# EAGLE board Qwiic_Button-1c-Panel (EAGLE 9.3.0), part 1 of 2
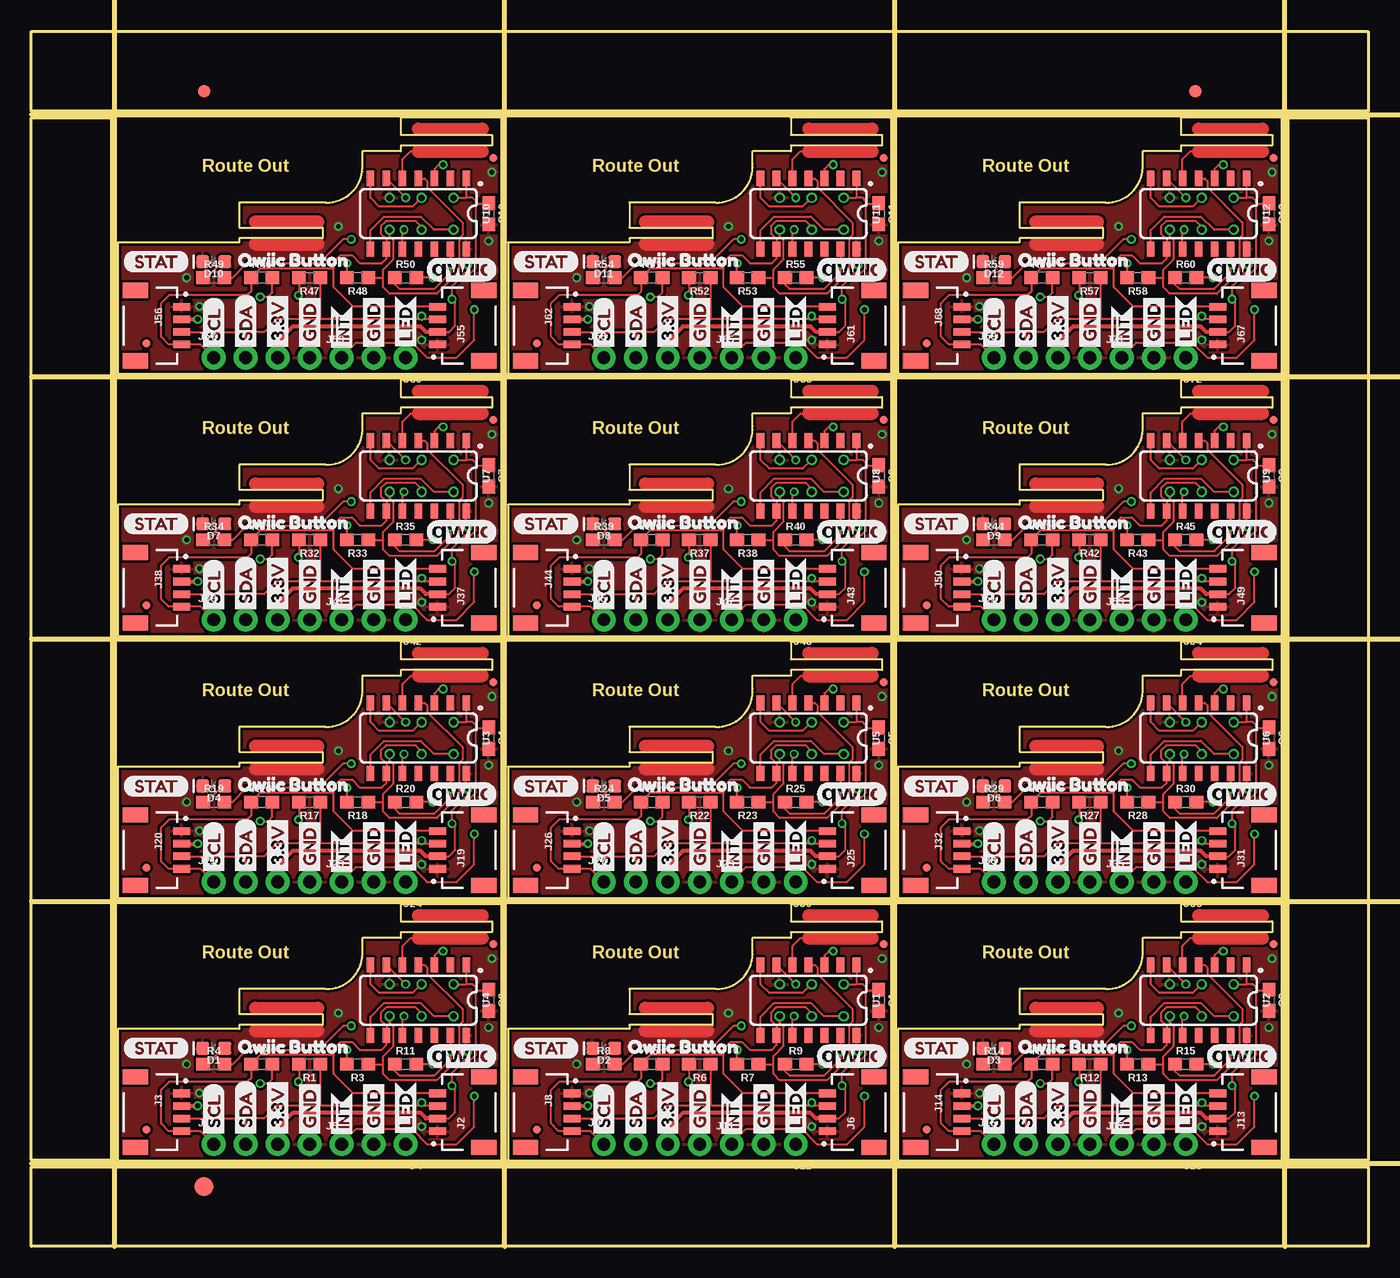
[diagram p0: board, top side]
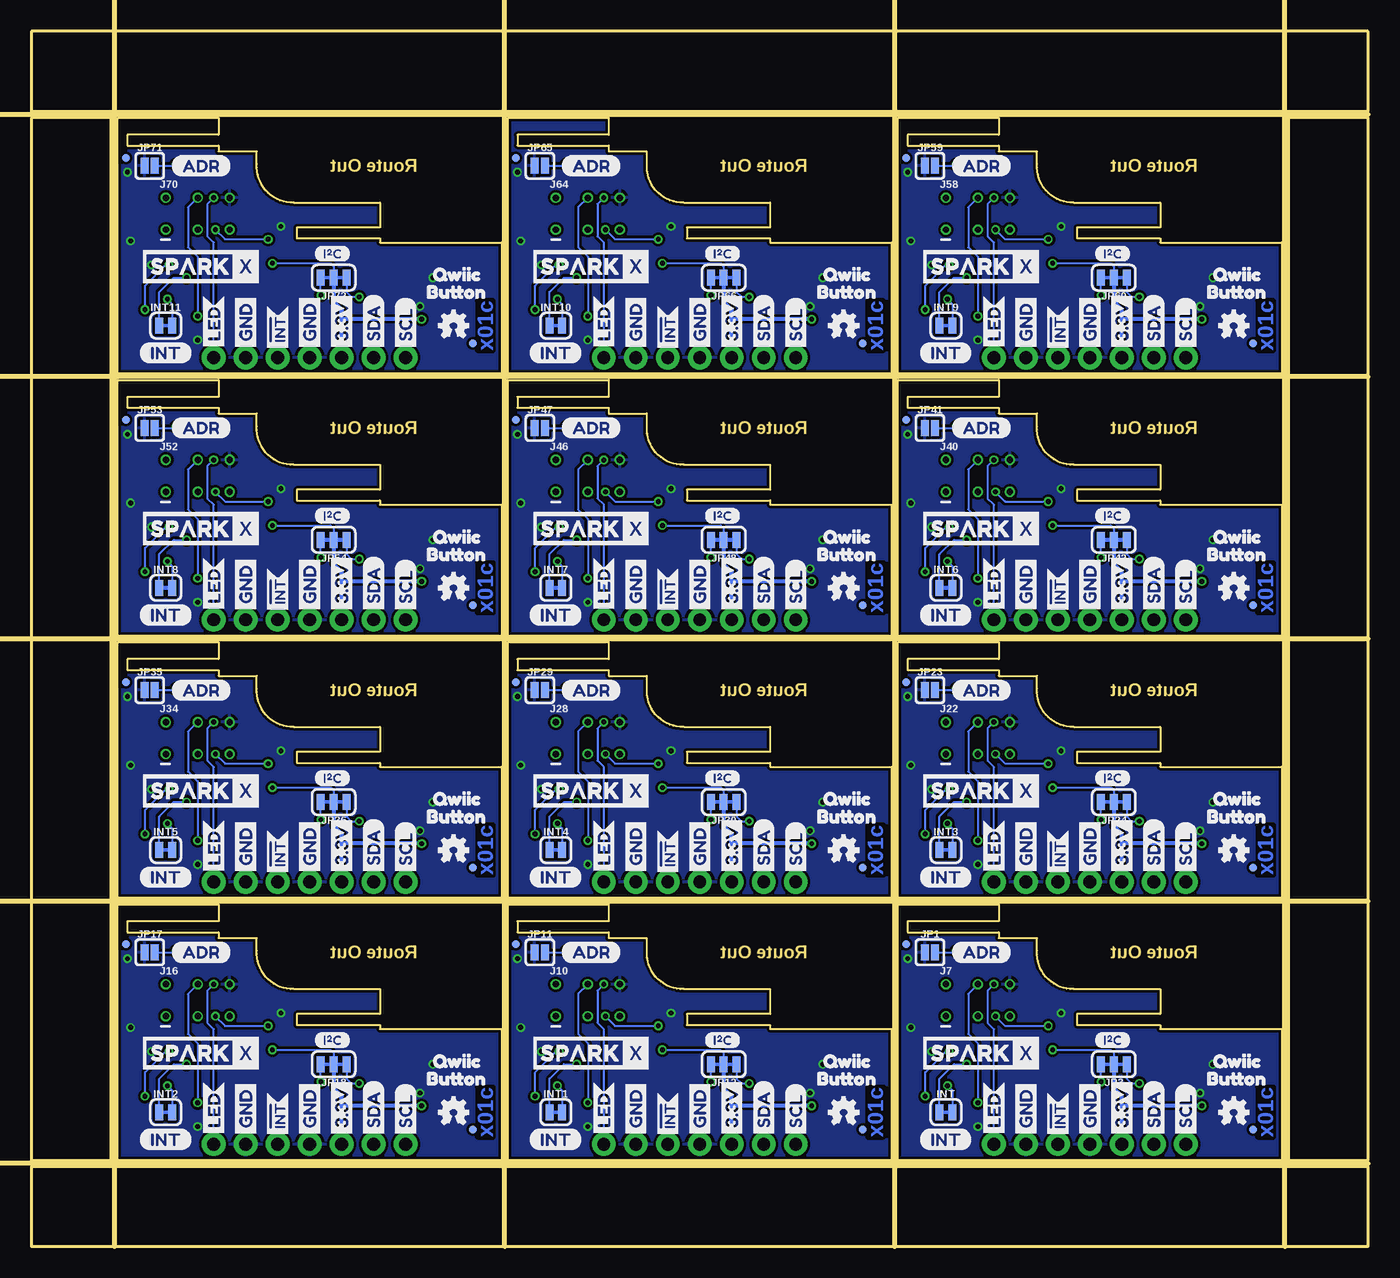
[diagram p1: board, bottom side, seen from below]

Size 106.17 x 96.52 mm. Coordinates in mm from the lower left corner, seen from the top.
Outline: 6.86,6.86 37.34,6.86 37.34,27.18 29.34,27.18 29.34,25.83 36.58,25.83 36.58,24.97 29.34,24.97 29.34,24.51 26.29,24.51 26.29,23.5 arc-96 23.37,20.45 16.51,20.45 16.51,18.47 23.11,18.47 23.11,17.6 16.51,17.6 16.51,17.27 6.86,17.27 6.86,6.86
Outline: 37.85,6.86 68.33,6.86 68.33,27.18 60.32,27.18 60.32,25.83 67.56,25.83 67.56,24.97 60.32,24.97 60.32,24.51 57.28,24.51 57.28,23.5 arc-96 54.36,20.45 47.5,20.45 47.5,18.47 54.1,18.47 54.1,17.6 47.5,17.6 47.5,17.27 37.85,17.27 37.85,6.86
Outline: 68.83,6.86 99.31,6.86 99.31,27.18 91.31,27.18 91.31,25.83 98.55,25.83 98.55,24.97 91.31,24.97 91.31,24.51 88.27,24.51 88.27,23.5 arc-96 85.34,20.45 78.49,20.45 78.49,18.47 85.09,18.47 85.09,17.6 78.49,17.6 78.49,17.27 68.83,17.27 68.83,6.86
Outline: 6.86,27.69 37.34,27.69 37.34,48.01 29.34,48.01 29.34,46.66 36.58,46.66 36.58,45.8 29.34,45.8 29.34,45.34 26.29,45.34 26.29,44.32 arc-96 23.37,41.27 16.51,41.27 16.51,39.29 23.11,39.29 23.11,38.43 16.51,38.43 16.51,38.1 6.86,38.1 6.86,27.69
Outline: 37.85,27.69 68.33,27.69 68.33,48.01 60.32,48.01 60.32,46.66 67.56,46.66 67.56,45.8 60.32,45.8 60.32,45.34 57.28,45.34 57.28,44.32 arc-96 54.36,41.27 47.5,41.27 47.5,39.29 54.1,39.29 54.1,38.43 47.5,38.43 47.5,38.1 37.85,38.1 37.85,27.69
Outline: 68.83,27.69 99.31,27.69 99.31,48.01 91.31,48.01 91.31,46.66 98.55,46.66 98.55,45.8 91.31,45.8 91.31,45.34 88.27,45.34 88.27,44.32 arc-96 85.34,41.27 78.49,41.27 78.49,39.29 85.09,39.29 85.09,38.43 78.49,38.43 78.49,38.1 68.83,38.1 68.83,27.69
Outline: 6.86,48.51 37.34,48.51 37.34,68.83 29.34,68.83 29.34,67.49 36.58,67.49 36.58,66.62 29.34,66.62 29.34,66.17 26.29,66.17 26.29,65.15 arc-96 23.37,62.1 16.51,62.1 16.51,60.12 23.11,60.12 23.11,59.26 16.51,59.26 16.51,58.93 6.86,58.93 6.86,48.51
Outline: 37.85,48.51 68.33,48.51 68.33,68.83 60.32,68.83 60.32,67.49 67.56,67.49 67.56,66.62 60.32,66.62 60.32,66.17 57.28,66.17 57.28,65.15 arc-96 54.36,62.1 47.5,62.1 47.5,60.12 54.1,60.12 54.1,59.26 47.5,59.26 47.5,58.93 37.85,58.93 37.85,48.51
Outline: 68.83,48.51 99.31,48.51 99.31,68.83 91.31,68.83 91.31,67.49 98.55,67.49 98.55,66.62 91.31,66.62 91.31,66.17 88.27,66.17 88.27,65.15 arc-96 85.34,62.1 78.49,62.1 78.49,60.12 85.09,60.12 85.09,59.26 78.49,59.26 78.49,58.93 68.83,58.93 68.83,48.51
Outline: 6.86,69.34 37.34,69.34 37.34,89.66 29.34,89.66 29.34,88.32 36.58,88.32 36.58,87.45 29.34,87.45 29.34,87 26.29,87 26.29,85.98 arc-96 23.37,82.93 16.51,82.93 16.51,80.95 23.11,80.95 23.11,80.09 16.51,80.09 16.51,79.76 6.86,79.76 6.86,69.34
Outline: 37.85,69.34 68.33,69.34 68.33,89.66 60.32,89.66 60.32,88.32 67.56,88.32 67.56,87.45 60.32,87.45 60.32,87 57.28,87 57.28,85.98 arc-96 54.36,82.93 47.5,82.93 47.5,80.95 54.1,80.95 54.1,80.09 47.5,80.09 47.5,79.76 37.85,79.76 37.85,69.34
Outline: 68.83,69.34 99.31,69.34 99.31,89.66 91.31,89.66 91.31,88.32 98.55,88.32 98.55,87.45 91.31,87.45 91.31,87 88.27,87 88.27,85.98 arc-96 85.34,82.93 78.49,82.93 78.49,80.95 85.09,80.95 85.09,80.09 78.49,80.09 78.49,79.76 68.83,79.76 68.83,69.34
Outline: 0,6.35 106.17,6.35 106.17,0 0,0 0,6.35
Outline: 99.82,89.66 106.17,89.66 106.17,6.86 99.82,6.86 99.82,89.66
Outline: 0,96.52 106.17,96.52 106.17,90.17 0,90.17 0,96.52
Outline: 0,89.66 6.35,89.66 6.35,6.86 0,6.86 0,89.66
Copper layers (1*16): Top 0.035mm / dielectric 1.5mm / Bottom 0.035mm
Design rules "SparkFun-2-layer-PCBWay-LIMIT": minimum track width 6mil, minimum drill 0.3mm, track to track 6mil, track to pad 6mil, pad to pad 6mil, via to via 6mil, smd to smd 6mil, copper to edge 6mil, drill to drill 6mil, minimum pad ring 6mil, minimum via ring 6mil, stop-mask expansion 4mil, vias tented up to drill 25mil, thermal gap 10mil
Milling: 9 lines

## Footprints (pad centres in the part's own frame; a part is rotated, then mirrored left to right if it is on the bottom)
0603 = smd 1.1 x 1: 1 -0.85,0; 2 0.85,0
LED-0603 = smd 1 x 1: A -0.877,0; C 0.877,0
FIDUCIAL-1X2 = smd 1 x 1: 1 0,0
FIDUCIAL-1.5X3 = smd 1.5 x 1.5: 1 0,0
SMT-JUMPER_2_NC_TRACE_SILK = smd 0.635 x 1.27: 1 -0.508,0; 2 0.508,0
1X04_NO_SILK = drill 1.016 pad 1.88: 1 0,0; 2 2.54,0; 3 5.08,0; 4 7.62,0
JST04_1MM_RA = smd 0.6 x 1.35: 1 -1.5,0; 2 -0.5,0; 3 0.5,0; 4 1.5,0 | smd 1.2 x 2: NC1 2.8,-3.675; NC2 -2.8,-3.675
1X02_NO_SILK = drill 1.016 pad 1.88: 1 0,0; 2 2.54,0
1X01_NO_SILK = drill 1.016 pad 1.88: 1 0,0
2X3_TEST_POINTS = drill 0.508: 1 -2.54,-1.27; 2 -2.54,1.27; 3 0,-1.27; 4 0,1.27; 5 2.54,-1.27; 6 2.54,1.27
SMT-JUMPER_2_NO_SILK = smd 0.635 x 1.27: 1 -0.406,0; 2 0.406,0
MICRO-FIDUCIAL = smd 0.635 x 0.635: 1 0,0
SMT-JUMPER_3_2-NC_TRACE_SILK = smd 0.635 x 1.27: 1 -1.016,0; 2 0,0; 3 1.016,0
SO14 = smd 0.6 x 1.2: 1 -3.175,-2.8; 2 -1.905,-2.8; 3 -0.635,-2.8; 4 0.635,-2.8; 5 1.905,-2.8; 6 3.175,-2.8; 7 4.445,-2.8; 8 4.445,2.8; 9 3.175,2.8; 10 1.905,2.8; 11 0.635,2.8; 12 -0.635,2.8; 13 -1.905,2.8; 14 -3.175,2.8

## Placement (x,y rotation side)
C1  0.1uF  [0603]  67.31,19.56 270 top
C2  0.1uF  [0603]  36.32,19.56 270 top
C3  0.1uF  [0603]  98.3,19.56 270 top
C4  0.1uF  [0603]  36.32,40.39 270 top
C5  0.1uF  [0603]  67.31,40.39 270 top
C6  0.1uF  [0603]  98.3,40.39 270 top
C7  0.1uF  [0603]  36.32,61.21 270 top
C8  0.1uF  [0603]  67.31,61.21 270 top
C9  0.1uF  [0603]  98.3,61.21 270 top
C10  0.1uF  [0603]  36.32,82.04 270 top
C11  0.1uF  [0603]  67.31,82.04 270 top
C12  0.1uF  [0603]  98.3,82.04 270 top
D1  RED  [LED-0603]  14.48,15.75 180 top
D2  RED  [LED-0603]  45.47,15.75 180 top
D3  RED  [LED-0603]  76.45,15.75 180 top
D4  RED  [LED-0603]  14.48,36.58 180 top
D5  RED  [LED-0603]  45.47,36.58 180 top
D6  RED  [LED-0603]  76.45,36.58 180 top
D7  RED  [LED-0603]  14.48,57.4 180 top
D8  RED  [LED-0603]  45.47,57.4 180 top
D9  RED  [LED-0603]  76.45,57.4 180 top
D10  RED  [LED-0603]  14.48,78.23 180 top
D11  RED  [LED-0603]  45.47,78.23 180 top
D12  RED  [LED-0603]  76.45,78.23 180 top
E$1  [FIDUCIAL-1X2]  13.72,91.76 0 top
E$2  [FIDUCIAL-1X2]  92.46,91.76 0 top
E$3  [FIDUCIAL-1.5X3]  13.72,4.76 0 top
INT  JUMPER-SMT_2_NC_TRACE_SILK  [SMT-JUMPER_2_NC_TRACE_SILK]  33.53,10.67 0 bottom
INT1  JUMPER-SMT_2_NC_TRACE_SILK  [SMT-JUMPER_2_NC_TRACE_SILK]  64.52,10.67 0 bottom
INT2  JUMPER-SMT_2_NC_TRACE_SILK  [SMT-JUMPER_2_NC_TRACE_SILK]  95.5,10.67 0 bottom
INT3  JUMPER-SMT_2_NC_TRACE_SILK  [SMT-JUMPER_2_NC_TRACE_SILK]  33.53,31.5 0 bottom
INT4  JUMPER-SMT_2_NC_TRACE_SILK  [SMT-JUMPER_2_NC_TRACE_SILK]  64.52,31.5 0 bottom
INT5  JUMPER-SMT_2_NC_TRACE_SILK  [SMT-JUMPER_2_NC_TRACE_SILK]  95.5,31.5 0 bottom
INT6  JUMPER-SMT_2_NC_TRACE_SILK  [SMT-JUMPER_2_NC_TRACE_SILK]  33.53,52.32 0 bottom
INT7  JUMPER-SMT_2_NC_TRACE_SILK  [SMT-JUMPER_2_NC_TRACE_SILK]  64.52,52.32 0 bottom
INT8  JUMPER-SMT_2_NC_TRACE_SILK  [SMT-JUMPER_2_NC_TRACE_SILK]  95.5,52.32 0 bottom
INT9  JUMPER-SMT_2_NC_TRACE_SILK  [SMT-JUMPER_2_NC_TRACE_SILK]  33.53,73.15 0 bottom
INT10  JUMPER-SMT_2_NC_TRACE_SILK  [SMT-JUMPER_2_NC_TRACE_SILK]  64.52,73.15 0 bottom
INT11  JUMPER-SMT_2_NC_TRACE_SILK  [SMT-JUMPER_2_NC_TRACE_SILK]  95.5,73.15 0 bottom
J1  [1X04_NO_SILK]  14.48,8.13 0 top
J2  [JST04_1MM_RA]  32.26,10.67 90 top
J3  [JST04_1MM_RA]  11.94,10.67 270 top
J4  [1X02_NO_SILK]  29.72,8.13 180 top
J5  [1X01_NO_SILK]  24.64,8.13 0 top
J6  [JST04_1MM_RA]  63.25,10.67 90 top
J7  ISP  [2X3_TEST_POINTS]  30.99,19.56 0 bottom
J8  [JST04_1MM_RA]  42.93,10.67 270 top
J9  [1X04_NO_SILK]  45.47,8.13 0 top
J10  ISP  [2X3_TEST_POINTS]  61.98,19.56 0 bottom
J11  [1X01_NO_SILK]  55.63,8.13 0 top
J12  [1X02_NO_SILK]  60.71,8.13 180 top
J13  [JST04_1MM_RA]  94.23,10.67 90 top
J14  [JST04_1MM_RA]  73.91,10.67 270 top
J15  [1X04_NO_SILK]  76.45,8.13 0 top
J16  ISP  [2X3_TEST_POINTS]  92.96,19.56 0 bottom
J17  [1X01_NO_SILK]  86.61,8.13 0 top
J18  [1X02_NO_SILK]  91.69,8.13 180 top
J19  [JST04_1MM_RA]  32.26,31.5 90 top
J20  [JST04_1MM_RA]  11.94,31.5 270 top
J21  [1X04_NO_SILK]  14.48,28.96 0 top
J22  ISP  [2X3_TEST_POINTS]  30.99,40.39 0 bottom
J23  [1X01_NO_SILK]  24.64,28.96 0 top
J24  [1X02_NO_SILK]  29.72,28.96 180 top
J25  [JST04_1MM_RA]  63.25,31.5 90 top
J26  [JST04_1MM_RA]  42.93,31.5 270 top
J27  [1X04_NO_SILK]  45.47,28.96 0 top
J28  ISP  [2X3_TEST_POINTS]  61.98,40.39 0 bottom
J29  [1X01_NO_SILK]  55.63,28.96 0 top
J30  [1X02_NO_SILK]  60.71,28.96 180 top
J31  [JST04_1MM_RA]  94.23,31.5 90 top
J32  [JST04_1MM_RA]  73.91,31.5 270 top
J33  [1X04_NO_SILK]  76.45,28.96 0 top
J34  ISP  [2X3_TEST_POINTS]  92.96,40.39 0 bottom
J35  [1X01_NO_SILK]  86.61,28.96 0 top
J36  [1X02_NO_SILK]  91.69,28.96 180 top
J37  [JST04_1MM_RA]  32.26,52.32 90 top
J38  [JST04_1MM_RA]  11.94,52.32 270 top
J39  [1X04_NO_SILK]  14.48,49.78 0 top
J40  ISP  [2X3_TEST_POINTS]  30.99,61.21 0 bottom
J41  [1X01_NO_SILK]  24.64,49.78 0 top
J42  [1X02_NO_SILK]  29.72,49.78 180 top
J43  [JST04_1MM_RA]  63.25,52.32 90 top
J44  [JST04_1MM_RA]  42.93,52.32 270 top
J45  [1X04_NO_SILK]  45.47,49.78 0 top
J46  ISP  [2X3_TEST_POINTS]  61.98,61.21 0 bottom
J47  [1X01_NO_SILK]  55.63,49.78 0 top
J48  [1X02_NO_SILK]  60.71,49.78 180 top
J49  [JST04_1MM_RA]  94.23,52.32 90 top
J50  [JST04_1MM_RA]  73.91,52.32 270 top
J51  [1X04_NO_SILK]  76.45,49.78 0 top
J52  ISP  [2X3_TEST_POINTS]  92.96,61.21 0 bottom
J53  [1X01_NO_SILK]  86.61,49.78 0 top
J54  [1X02_NO_SILK]  91.69,49.78 180 top
J55  [JST04_1MM_RA]  32.26,73.15 90 top
J56  [JST04_1MM_RA]  11.94,73.15 270 top
J57  [1X04_NO_SILK]  14.48,70.61 0 top
J58  ISP  [2X3_TEST_POINTS]  30.99,82.04 0 bottom
J59  [1X01_NO_SILK]  24.64,70.61 0 top
J60  [1X02_NO_SILK]  29.72,70.61 180 top
J61  [JST04_1MM_RA]  63.25,73.15 90 top
J62  [JST04_1MM_RA]  42.93,73.15 270 top
J63  [1X04_NO_SILK]  45.47,70.61 0 top
J64  ISP  [2X3_TEST_POINTS]  61.98,82.04 0 bottom
J65  [1X01_NO_SILK]  55.63,70.61 0 top
J66  [1X02_NO_SILK]  60.71,70.61 180 top
J67  [JST04_1MM_RA]  94.23,73.15 90 top
J68  [JST04_1MM_RA]  73.91,73.15 270 top
J69  [1X04_NO_SILK]  76.45,70.61 0 top
J70  ISP  [2X3_TEST_POINTS]  92.96,82.04 0 bottom
J71  [1X01_NO_SILK]  86.61,70.61 0 top
J72  [1X02_NO_SILK]  91.69,70.61 180 top
JP1  [SMT-JUMPER_2_NO_SILK]  34.8,23.37 0 bottom
JP2  FIDUCIALUFIDUCIAL  [MICRO-FIDUCIAL]  36.7,24 0 bottom
JP3  [SMT-JUMPER_3_2-NC_TRACE_SILK]  20.19,14.48 180 bottom
JP4  FIDUCIALUFIDUCIAL  [MICRO-FIDUCIAL]  67.69,24 0 bottom
JP5  FIDUCIALUFIDUCIAL  [MICRO-FIDUCIAL]  40.13,9.27 0 bottom
JP6  FIDUCIALUFIDUCIAL  [MICRO-FIDUCIAL]  9.14,9.27 0 bottom
JP7  FIDUCIALUFIDUCIAL  [MICRO-FIDUCIAL]  40.13,9.27 0 top
JP8  FIDUCIALUFIDUCIAL  [MICRO-FIDUCIAL]  9.14,9.27 0 top
JP9  FIDUCIALUFIDUCIAL  [MICRO-FIDUCIAL]  36.7,24 0 top
JP10  FIDUCIALUFIDUCIAL  [MICRO-FIDUCIAL]  67.69,24 0 top
JP11  [SMT-JUMPER_2_NO_SILK]  65.79,23.37 0 bottom
JP12  [SMT-JUMPER_3_2-NC_TRACE_SILK]  51.18,14.48 180 bottom
JP13  FIDUCIALUFIDUCIAL  [MICRO-FIDUCIAL]  98.68,24 0 bottom
JP14  FIDUCIALUFIDUCIAL  [MICRO-FIDUCIAL]  71.12,9.27 0 bottom
JP15  FIDUCIALUFIDUCIAL  [MICRO-FIDUCIAL]  71.12,9.27 0 top
JP16  FIDUCIALUFIDUCIAL  [MICRO-FIDUCIAL]  98.68,24 0 top
JP17  [SMT-JUMPER_2_NO_SILK]  96.77,23.37 0 bottom
JP18  [SMT-JUMPER_3_2-NC_TRACE_SILK]  82.17,14.48 180 bottom
JP19  FIDUCIALUFIDUCIAL  [MICRO-FIDUCIAL]  36.7,44.83 0 bottom
JP20  FIDUCIALUFIDUCIAL  [MICRO-FIDUCIAL]  9.14,30.1 0 bottom
JP21  FIDUCIALUFIDUCIAL  [MICRO-FIDUCIAL]  9.14,30.1 0 top
JP22  FIDUCIALUFIDUCIAL  [MICRO-FIDUCIAL]  36.7,44.83 0 top
JP23  [SMT-JUMPER_2_NO_SILK]  34.8,44.2 0 bottom
JP24  [SMT-JUMPER_3_2-NC_TRACE_SILK]  20.19,35.31 180 bottom
JP25  FIDUCIALUFIDUCIAL  [MICRO-FIDUCIAL]  67.69,44.83 0 bottom
JP26  FIDUCIALUFIDUCIAL  [MICRO-FIDUCIAL]  40.13,30.1 0 bottom
JP27  FIDUCIALUFIDUCIAL  [MICRO-FIDUCIAL]  40.13,30.1 0 top
JP28  FIDUCIALUFIDUCIAL  [MICRO-FIDUCIAL]  67.69,44.83 0 top
JP29  [SMT-JUMPER_2_NO_SILK]  65.79,44.2 0 bottom
JP30  [SMT-JUMPER_3_2-NC_TRACE_SILK]  51.18,35.31 180 bottom
JP31  FIDUCIALUFIDUCIAL  [MICRO-FIDUCIAL]  98.68,44.83 0 bottom
JP32  FIDUCIALUFIDUCIAL  [MICRO-FIDUCIAL]  71.12,30.1 0 bottom
JP33  FIDUCIALUFIDUCIAL  [MICRO-FIDUCIAL]  71.12,30.1 0 top
JP34  FIDUCIALUFIDUCIAL  [MICRO-FIDUCIAL]  98.68,44.83 0 top
JP35  [SMT-JUMPER_2_NO_SILK]  96.77,44.2 0 bottom
JP36  [SMT-JUMPER_3_2-NC_TRACE_SILK]  82.17,35.31 180 bottom
JP37  FIDUCIALUFIDUCIAL  [MICRO-FIDUCIAL]  36.7,65.66 0 bottom
JP38  FIDUCIALUFIDUCIAL  [MICRO-FIDUCIAL]  9.14,50.93 0 bottom
JP39  FIDUCIALUFIDUCIAL  [MICRO-FIDUCIAL]  9.14,50.93 0 top
JP40  FIDUCIALUFIDUCIAL  [MICRO-FIDUCIAL]  36.7,65.66 0 top
JP41  [SMT-JUMPER_2_NO_SILK]  34.8,65.02 0 bottom
JP42  [SMT-JUMPER_3_2-NC_TRACE_SILK]  20.19,56.13 180 bottom
JP43  FIDUCIALUFIDUCIAL  [MICRO-FIDUCIAL]  67.69,65.66 0 bottom
JP44  FIDUCIALUFIDUCIAL  [MICRO-FIDUCIAL]  40.13,50.93 0 bottom
JP45  FIDUCIALUFIDUCIAL  [MICRO-FIDUCIAL]  40.13,50.93 0 top
JP46  FIDUCIALUFIDUCIAL  [MICRO-FIDUCIAL]  67.69,65.66 0 top
JP47  [SMT-JUMPER_2_NO_SILK]  65.79,65.02 0 bottom
JP48  [SMT-JUMPER_3_2-NC_TRACE_SILK]  51.18,56.13 180 bottom
JP49  FIDUCIALUFIDUCIAL  [MICRO-FIDUCIAL]  98.68,65.66 0 bottom
JP50  FIDUCIALUFIDUCIAL  [MICRO-FIDUCIAL]  71.12,50.93 0 bottom
JP51  FIDUCIALUFIDUCIAL  [MICRO-FIDUCIAL]  71.12,50.93 0 top
JP52  FIDUCIALUFIDUCIAL  [MICRO-FIDUCIAL]  98.68,65.66 0 top
JP53  [SMT-JUMPER_2_NO_SILK]  96.77,65.02 0 bottom
JP54  [SMT-JUMPER_3_2-NC_TRACE_SILK]  82.17,56.13 180 bottom
JP55  FIDUCIALUFIDUCIAL  [MICRO-FIDUCIAL]  36.7,86.49 0 bottom
JP56  FIDUCIALUFIDUCIAL  [MICRO-FIDUCIAL]  9.14,71.76 0 bottom
JP57  FIDUCIALUFIDUCIAL  [MICRO-FIDUCIAL]  9.14,71.76 0 top
JP58  FIDUCIALUFIDUCIAL  [MICRO-FIDUCIAL]  36.7,86.49 0 top
JP59  [SMT-JUMPER_2_NO_SILK]  34.8,85.85 0 bottom
JP60  [SMT-JUMPER_3_2-NC_TRACE_SILK]  20.19,76.96 180 bottom
JP61  FIDUCIALUFIDUCIAL  [MICRO-FIDUCIAL]  67.69,86.49 0 bottom
JP62  FIDUCIALUFIDUCIAL  [MICRO-FIDUCIAL]  40.13,71.76 0 bottom
JP63  FIDUCIALUFIDUCIAL  [MICRO-FIDUCIAL]  40.13,71.76 0 top
JP64  FIDUCIALUFIDUCIAL  [MICRO-FIDUCIAL]  67.69,86.49 0 top
JP65  [SMT-JUMPER_2_NO_SILK]  65.79,85.85 0 bottom
JP66  [SMT-JUMPER_3_2-NC_TRACE_SILK]  51.18,76.96 180 bottom
JP67  FIDUCIALUFIDUCIAL  [MICRO-FIDUCIAL]  98.68,86.49 0 bottom
JP68  FIDUCIALUFIDUCIAL  [MICRO-FIDUCIAL]  71.12,71.76 0 bottom
JP69  FIDUCIALUFIDUCIAL  [MICRO-FIDUCIAL]  71.12,71.76 0 top
JP70  FIDUCIALUFIDUCIAL  [MICRO-FIDUCIAL]  98.68,86.49 0 top
JP71  [SMT-JUMPER_2_NO_SILK]  96.77,85.85 0 bottom
JP72  [SMT-JUMPER_3_2-NC_TRACE_SILK]  82.17,76.96 180 bottom
LOGO1  OSHW-LOGOMINI  [OSHW-LOGO-MINI]  10.67,10.67 0 bottom
LOGO2  OSHW-LOGOMINI  [OSHW-LOGO-MINI]  41.66,10.67 0 bottom
LOGO3  OSHW-LOGOMINI  [OSHW-LOGO-MINI]  72.64,10.67 0 bottom
LOGO4  OSHW-LOGOMINI  [OSHW-LOGO-MINI]  10.67,31.5 0 bottom
LOGO5  OSHW-LOGOMINI  [OSHW-LOGO-MINI]  41.66,31.5 0 bottom
LOGO6  OSHW-LOGOMINI  [OSHW-LOGO-MINI]  72.64,31.5 0 bottom
LOGO7  OSHW-LOGOMINI  [OSHW-LOGO-MINI]  10.67,52.32 0 bottom
LOGO8  OSHW-LOGOMINI  [OSHW-LOGO-MINI]  41.66,52.32 0 bottom
LOGO9  OSHW-LOGOMINI  [OSHW-LOGO-MINI]  72.64,52.32 0 bottom
LOGO10  OSHW-LOGOMINI  [OSHW-LOGO-MINI]  10.67,73.15 0 bottom
LOGO11  OSHW-LOGOMINI  [OSHW-LOGO-MINI]  41.66,73.15 0 bottom
LOGO12  OSHW-LOGOMINI  [OSHW-LOGO-MINI]  72.64,73.15 0 bottom
R1  2.2k  [0603]  22.1,14.48 180 top
R2  2.2k  [0603]  18.29,14.48 0 top
R3  10k  [0603]  25.91,14.48 180 top
R4  1k  [0603]  14.48,14.48 0 top
R5  2.2k  [0603]  49.28,14.48 0 top
R6  2.2k  [0603]  53.09,14.48 180 top
R7  10k  [0603]  56.9,14.48 180 top
R8  1k  [0603]  45.47,14.48 0 top
R9  10k  [0603]  60.71,14.48 0 top
R10  2.2k  [0603]  80.26,14.48 0 top
R11  10k  [0603]  29.72,14.48 0 top
R12  2.2k  [0603]  84.07,14.48 180 top
R13  10k  [0603]  87.88,14.48 180 top
R14  1k  [0603]  76.45,14.48 0 top
R15  10k  [0603]  91.69,14.48 0 top
R16  2.2k  [0603]  18.29,35.31 0 top
R17  2.2k  [0603]  22.1,35.31 180 top
R18  10k  [0603]  25.91,35.31 180 top
R19  1k  [0603]  14.48,35.31 0 top
R20  10k  [0603]  29.72,35.31 0 top
R21  2.2k  [0603]  49.28,35.31 0 top
R22  2.2k  [0603]  53.09,35.31 180 top
R23  10k  [0603]  56.9,35.31 180 top
R24  1k  [0603]  45.47,35.31 0 top
R25  10k  [0603]  60.71,35.31 0 top
R26  2.2k  [0603]  80.26,35.31 0 top
R27  2.2k  [0603]  84.07,35.31 180 top
R28  10k  [0603]  87.88,35.31 180 top
R29  1k  [0603]  76.45,35.31 0 top
R30  10k  [0603]  91.69,35.31 0 top
R31  2.2k  [0603]  18.29,56.13 0 top
R32  2.2k  [0603]  22.1,56.13 180 top
R33  10k  [0603]  25.91,56.13 180 top
R34  1k  [0603]  14.48,56.13 0 top
R35  10k  [0603]  29.72,56.13 0 top
R36  2.2k  [0603]  49.28,56.13 0 top
R37  2.2k  [0603]  53.09,56.13 180 top
R38  10k  [0603]  56.9,56.13 180 top
R39  1k  [0603]  45.47,56.13 0 top
R40  10k  [0603]  60.71,56.13 0 top
R41  2.2k  [0603]  80.26,56.13 0 top
R42  2.2k  [0603]  84.07,56.13 180 top
R43  10k  [0603]  87.88,56.13 180 top
R44  1k  [0603]  76.45,56.13 0 top
R45  10k  [0603]  91.69,56.13 0 top
R46  2.2k  [0603]  18.29,76.96 0 top
R47  2.2k  [0603]  22.1,76.96 180 top
R48  10k  [0603]  25.91,76.96 180 top
R49  1k  [0603]  14.48,76.96 0 top
R50  10k  [0603]  29.72,76.96 0 top
R51  2.2k  [0603]  49.28,76.96 0 top
R52  2.2k  [0603]  53.09,76.96 180 top
R53  10k  [0603]  56.9,76.96 180 top
R54  1k  [0603]  45.47,76.96 0 top
R55  10k  [0603]  60.71,76.96 0 top
R56  2.2k  [0603]  80.26,76.96 0 top
R57  2.2k  [0603]  84.07,76.96 180 top
R58  10k  [0603]  87.88,76.96 180 top
R59  1k  [0603]  76.45,76.96 0 top
R60  10k  [0603]  91.69,76.96 0 top
U1  ATTINY84-ARDUINO  [SO14]  62.36,19.56 180 top
U2  ATTINY84-ARDUINO  [SO14]  93.34,19.56 180 top
U3  ATTINY84-ARDUINO  [SO14]  31.37,40.39 180 top
U4  ATTINY84-ARDUINO  [SO14]  31.37,19.56 180 top
U5  ATTINY84-ARDUINO  [SO14]  62.36,40.39 180 top
U6  ATTINY84-ARDUINO  [SO14]  93.34,40.39 180 top
U7  ATTINY84-ARDUINO  [SO14]  31.37,61.21 180 top
U8  ATTINY84-ARDUINO  [SO14]  62.36,61.21 180 top
U9  ATTINY84-ARDUINO  [SO14]  93.34,61.21 180 top
U10  ATTINY84-ARDUINO  [SO14]  31.37,82.04 180 top
U11  ATTINY84-ARDUINO  [SO14]  62.36,82.04 180 top
U12  ATTINY84-ARDUINO  [SO14]  93.34,82.04 180 top
U$1  [QWIIC0]  15.49,15.88 0 top
U$2  [BUTTON1]  19.56,15.88 0 top
U$3  [LED2]  29.72,8.51 90 top
U$4  [INT-()-04]  35.69,8.51 0 bottom
U$5  [SCL]  14.48,8.51 90 bottom
U$6  [SDA]  17.02,8.51 90 bottom
U$7  [3.3V]  19.56,8.51 90 bottom
U$8  [GND]  22.1,8.51 90 bottom
U$9  [(ADR)]  33.15,23.37 0 bottom
U$10  [I_SUPER2_C-()-03]  21.72,16.38 0 bottom
U$11  [INT#-[<-04]  24.64,8.25 90 top
U$12  [SDA]  17.02,8.51 90 top
U$13  [GND]  22.1,8.51 90 top
U$14  [SCL]  14.48,8.51 90 top
U$15  [INT#-[<-04]  24.64,8.25 90 bottom
U$16  [GND]  27.18,8.51 90 top
U$17  [GND]  27.18,8.51 90 bottom
U$18  [SPARKX-MEDIUM]  30.73,15.37 0 bottom
U$19  [LED2]  29.72,8.51 90 bottom
U$20  [BUTTON1]  13.72,13.34 0 bottom
U$21  [STAT1]  7.24,15.75 0 top
U$22  [3.3V]  19.56,8.51 90 top
U$23  [QWIIC0]  13.21,14.73 0 bottom
U$24  [QWIIC_5.5MM]  34.16,15.11 0 top
U$25  [SCL]  45.47,8.51 90 bottom
U$26  [SDA]  48.01,8.51 90 bottom
U$27  [3.3V]  50.55,8.51 90 bottom
U$28  [GND]  53.09,8.51 90 bottom
U$29  [(ADR)]  64.14,23.37 0 bottom
U$30  [GND]  53.09,8.51 90 top
U$31  [3.3V]  50.55,8.51 90 top
U$32  [I_SUPER2_C-()-03]  52.7,16.38 0 bottom
U$33  [INT#-[<-04]  55.63,8.25 90 top
U$34  [SDA]  48.01,8.51 90 top
U$35  [SCL]  45.47,8.51 90 top
U$36  [INT#-[<-04]  55.63,8.25 90 bottom
U$37  [GND]  58.17,8.51 90 top
U$38  [GND]  58.17,8.51 90 bottom
U$39  [SPARKX-MEDIUM]  61.72,15.37 0 bottom
U$40  [INT-()-04]  66.67,8.51 0 bottom
U$41  [LED2]  60.71,8.51 90 top
U$42  [LED2]  60.71,8.51 90 bottom
U$43  [STAT1]  38.23,15.75 0 top
U$44  [QWIIC0]  46.48,15.88 0 top
U$45  [BUTTON1]  50.55,15.88 0 top
U$46  [BUTTON1]  44.7,13.34 0 bottom
U$47  [QWIIC0]  44.2,14.73 0 bottom
U$48  [QWIIC_5.5MM]  65.15,15.11 0 top
U$49  [SCL]  76.45,8.51 90 bottom
U$50  [SDA]  78.99,8.51 90 bottom
U$51  [3.3V]  81.53,8.51 90 bottom
U$52  [GND]  84.07,8.51 90 bottom
U$53  [(ADR)]  95.12,23.37 0 bottom
U$54  [GND]  84.07,8.51 90 top
U$55  [3.3V]  81.53,8.51 90 top
U$56  [I_SUPER2_C-()-03]  83.69,16.38 0 bottom
U$57  [INT#-[<-04]  86.61,8.25 90 top
U$58  [SDA]  78.99,8.51 90 top
U$59  [SCL]  76.45,8.51 90 top
U$60  [INT#-[<-04]  86.61,8.25 90 bottom
U$61  [GND]  89.15,8.51 90 top
U$62  [GND]  89.15,8.51 90 bottom
U$63  [SPARKX-MEDIUM]  92.71,15.37 0 bottom
U$64  [INT-()-04]  97.66,8.51 0 bottom
U$65  [LED2]  91.69,8.51 90 top
U$66  [LED2]  91.69,8.51 90 bottom
U$67  [STAT1]  69.22,15.75 0 top
U$68  [QWIIC0]  77.47,15.88 0 top
U$69  [BUTTON1]  81.53,15.88 0 top
U$70  [BUTTON1]  75.69,13.34 0 bottom
U$71  [QWIIC0]  75.18,14.73 0 bottom
U$72  [QWIIC_5.5MM]  96.14,15.11 0 top
U$73  [SCL]  14.48,29.34 90 bottom
U$74  [SDA]  17.02,29.34 90 bottom
U$75  [3.3V]  19.56,29.34 90 bottom
U$76  [GND]  22.1,29.34 90 bottom
U$77  [(ADR)]  33.15,44.2 0 bottom
U$78  [GND]  22.1,29.34 90 top
U$79  [3.3V]  19.56,29.34 90 top
U$80  [I_SUPER2_C-()-03]  21.72,37.21 0 bottom
U$81  [INT#-[<-04]  24.64,29.08 90 top
U$82  [SDA]  17.02,29.34 90 top
U$83  [SCL]  14.48,29.34 90 top
U$84  [INT#-[<-04]  24.64,29.08 90 bottom
U$85  [GND]  27.18,29.34 90 top
U$86  [GND]  27.18,29.34 90 bottom
U$87  [SPARKX-MEDIUM]  30.73,36.2 0 bottom
U$88  [INT-()-04]  35.69,29.34 0 bottom
U$89  [LED2]  29.72,29.34 90 top
U$90  [LED2]  29.72,29.34 90 bottom
U$91  [STAT1]  7.24,36.58 0 top
U$92  [QWIIC0]  15.49,36.7 0 top
U$93  [BUTTON1]  19.56,36.7 0 top
U$94  [BUTTON1]  13.72,34.16 0 bottom
U$95  [QWIIC0]  13.21,35.56 0 bottom
U$96  [QWIIC_5.5MM]  34.16,35.94 0 top
U$97  [SCL]  45.47,29.34 90 bottom
U$98  [SDA]  48.01,29.34 90 bottom
U$99  [3.3V]  50.55,29.34 90 bottom
U$100  [GND]  53.09,29.34 90 bottom
U$101  [(ADR)]  64.14,44.2 0 bottom
U$102  [GND]  53.09,29.34 90 top
U$103  [3.3V]  50.55,29.34 90 top
U$104  [I_SUPER2_C-()-03]  52.7,37.21 0 bottom
U$105  [INT#-[<-04]  55.63,29.08 90 top
U$106  [SDA]  48.01,29.34 90 top
U$107  [SCL]  45.47,29.34 90 top
U$108  [INT#-[<-04]  55.63,29.08 90 bottom
U$109  [GND]  58.17,29.34 90 top
U$110  [GND]  58.17,29.34 90 bottom
U$111  [SPARKX-MEDIUM]  61.72,36.2 0 bottom
U$112  [INT-()-04]  66.67,29.34 0 bottom
U$113  [LED2]  60.71,29.34 90 top
U$114  [LED2]  60.71,29.34 90 bottom
U$115  [STAT1]  38.23,36.58 0 top
U$116  [QWIIC0]  46.48,36.7 0 top
U$117  [BUTTON1]  50.55,36.7 0 top
U$118  [BUTTON1]  44.7,34.16 0 bottom
U$119  [QWIIC0]  44.2,35.56 0 bottom
U$120  [QWIIC_5.5MM]  65.15,35.94 0 top
U$121  [SCL]  76.45,29.34 90 bottom
U$122  [SDA]  78.99,29.34 90 bottom
U$123  [3.3V]  81.53,29.34 90 bottom
U$124  [GND]  84.07,29.34 90 bottom
U$125  [(ADR)]  95.12,44.2 0 bottom
U$126  [GND]  84.07,29.34 90 top
U$127  [3.3V]  81.53,29.34 90 top
U$128  [I_SUPER2_C-()-03]  83.69,37.21 0 bottom
U$129  [INT#-[<-04]  86.61,29.08 90 top
U$130  [SDA]  78.99,29.34 90 top
U$131  [SCL]  76.45,29.34 90 top
U$132  [INT#-[<-04]  86.61,29.08 90 bottom
U$133  [GND]  89.15,29.34 90 top
U$134  [GND]  89.15,29.34 90 bottom
U$135  [SPARKX-MEDIUM]  92.71,36.2 0 bottom
U$136  [INT-()-04]  97.66,29.34 0 bottom
U$137  [LED2]  91.69,29.34 90 top
U$138  [LED2]  91.69,29.34 90 bottom
U$139  [STAT1]  69.22,36.58 0 top
U$140  [QWIIC0]  77.47,36.7 0 top
U$141  [BUTTON1]  81.53,36.7 0 top
U$142  [BUTTON1]  75.69,34.16 0 bottom
U$143  [QWIIC0]  75.18,35.56 0 bottom
U$144  [QWIIC_5.5MM]  96.14,35.94 0 top
U$145  [SCL]  14.48,50.16 90 bottom
U$146  [SDA]  17.02,50.16 90 bottom
U$147  [3.3V]  19.56,50.16 90 bottom
U$148  [GND]  22.1,50.16 90 bottom
U$149  [(ADR)]  33.15,65.02 0 bottom
U$150  [GND]  22.1,50.16 90 top
U$151  [3.3V]  19.56,50.16 90 top
U$152  [I_SUPER2_C-()-03]  21.72,58.04 0 bottom
U$153  [INT#-[<-04]  24.64,49.91 90 top
U$154  [SDA]  17.02,50.16 90 top
U$155  [SCL]  14.48,50.16 90 top
U$156  [INT#-[<-04]  24.64,49.91 90 bottom
U$157  [GND]  27.18,50.16 90 top
U$158  [GND]  27.18,50.16 90 bottom
U$159  [SPARKX-MEDIUM]  30.73,57.02 0 bottom
U$160  [INT-()-04]  35.69,50.16 0 bottom
U$161  [LED2]  29.72,50.16 90 top
U$162  [LED2]  29.72,50.16 90 bottom
U$163  [STAT1]  7.24,57.4 0 top
U$164  [QWIIC0]  15.49,57.53 0 top
U$165  [BUTTON1]  19.56,57.53 0 top
U$166  [BUTTON1]  13.72,54.99 0 bottom
U$167  [QWIIC0]  13.21,56.39 0 bottom
U$168  [QWIIC_5.5MM]  34.16,56.77 0 top
U$169  [SCL]  45.47,50.16 90 bottom
U$170  [SDA]  48.01,50.16 90 bottom
U$171  [3.3V]  50.55,50.16 90 bottom
U$172  [GND]  53.09,50.16 90 bottom
U$173  [(ADR)]  64.14,65.02 0 bottom
U$174  [GND]  53.09,50.16 90 top
U$175  [3.3V]  50.55,50.16 90 top
U$176  [I_SUPER2_C-()-03]  52.7,58.04 0 bottom
U$177  [INT#-[<-04]  55.63,49.91 90 top
U$178  [SDA]  48.01,50.16 90 top
U$179  [SCL]  45.47,50.16 90 top
U$180  [INT#-[<-04]  55.63,49.91 90 bottom
U$181  [GND]  58.17,50.16 90 top
U$182  [GND]  58.17,50.16 90 bottom
U$183  [SPARKX-MEDIUM]  61.72,57.02 0 bottom
U$184  [INT-()-04]  66.67,50.16 0 bottom
U$185  [LED2]  60.71,50.16 90 top
U$186  [LED2]  60.71,50.16 90 bottom
U$187  [STAT1]  38.23,57.4 0 top
U$188  [QWIIC0]  46.48,57.53 0 top
U$189  [BUTTON1]  50.55,57.53 0 top
U$190  [BUTTON1]  44.7,54.99 0 bottom
U$191  [QWIIC0]  44.2,56.39 0 bottom
U$192  [QWIIC_5.5MM]  65.15,56.77 0 top
U$193  [SCL]  76.45,50.16 90 bottom
U$194  [SDA]  78.99,50.16 90 bottom
U$195  [3.3V]  81.53,50.16 90 bottom
U$196  [GND]  84.07,50.16 90 bottom
U$197  [(ADR)]  95.12,65.02 0 bottom
U$198  [GND]  84.07,50.16 90 top
U$199  [3.3V]  81.53,50.16 90 top
U$200  [I_SUPER2_C-()-03]  83.69,58.04 0 bottom
U$201  [INT#-[<-04]  86.61,49.91 90 top
U$202  [SDA]  78.99,50.16 90 top
U$203  [SCL]  76.45,50.16 90 top
U$204  [INT#-[<-04]  86.61,49.91 90 bottom
U$205  [GND]  89.15,50.16 90 top
U$206  [GND]  89.15,50.16 90 bottom
U$207  [SPARKX-MEDIUM]  92.71,57.02 0 bottom
U$208  [INT-()-04]  97.66,50.16 0 bottom
U$209  [LED2]  91.69,50.16 90 top
U$210  [LED2]  91.69,50.16 90 bottom
U$211  [STAT1]  69.22,57.4 0 top
U$212  [QWIIC0]  77.47,57.53 0 top
U$213  [BUTTON1]  81.53,57.53 0 top
U$214  [BUTTON1]  75.69,54.99 0 bottom
U$215  [QWIIC0]  75.18,56.39 0 bottom
U$216  [QWIIC_5.5MM]  96.14,56.77 0 top
U$217  [SCL]  14.48,70.99 90 bottom
U$218  [SDA]  17.02,70.99 90 bottom
U$219  [3.3V]  19.56,70.99 90 bottom
U$220  [GND]  22.1,70.99 90 bottom
U$221  [(ADR)]  33.15,85.85 0 bottom
U$222  [GND]  22.1,70.99 90 top
U$223  [3.3V]  19.56,70.99 90 top
U$224  [I_SUPER2_C-()-03]  21.72,78.87 0 bottom
U$225  [INT#-[<-04]  24.64,70.74 90 top
U$226  [SDA]  17.02,70.99 90 top
U$227  [SCL]  14.48,70.99 90 top
U$228  [INT#-[<-04]  24.64,70.74 90 bottom
U$229  [GND]  27.18,70.99 90 top
U$230  [GND]  27.18,70.99 90 bottom
U$231  [SPARKX-MEDIUM]  30.73,77.85 0 bottom
U$232  [INT-()-04]  35.69,70.99 0 bottom
U$233  [LED2]  29.72,70.99 90 top
U$234  [LED2]  29.72,70.99 90 bottom
U$235  [STAT1]  7.24,78.23 0 top
U$236  [QWIIC0]  15.49,78.36 0 top
U$237  [BUTTON1]  19.56,78.36 0 top
U$238  [BUTTON1]  13.72,75.82 0 bottom
U$239  [QWIIC0]  13.21,77.22 0 bottom
U$240  [QWIIC_5.5MM]  34.16,77.6 0 top
U$241  [SCL]  45.47,70.99 90 bottom
U$242  [SDA]  48.01,70.99 90 bottom
U$243  [3.3V]  50.55,70.99 90 bottom
U$244  [GND]  53.09,70.99 90 bottom
U$245  [(ADR)]  64.14,85.85 0 bottom
U$246  [GND]  53.09,70.99 90 top
U$247  [3.3V]  50.55,70.99 90 top
U$248  [I_SUPER2_C-()-03]  52.7,78.87 0 bottom
U$249  [INT#-[<-04]  55.63,70.74 90 top
U$250  [SDA]  48.01,70.99 90 top
U$251  [SCL]  45.47,70.99 90 top
U$252  [INT#-[<-04]  55.63,70.74 90 bottom
U$253  [GND]  58.17,70.99 90 top
U$254  [GND]  58.17,70.99 90 bottom
U$255  [SPARKX-MEDIUM]  61.72,77.85 0 bottom
U$256  [INT-()-04]  66.67,70.99 0 bottom
U$257  [LED2]  60.71,70.99 90 top
U$258  [LED2]  60.71,70.99 90 bottom
U$259  [STAT1]  38.23,78.23 0 top
U$260  [QWIIC0]  46.48,78.36 0 top
U$261  [BUTTON1]  50.55,78.36 0 top
U$262  [BUTTON1]  44.7,75.82 0 bottom
U$263  [QWIIC0]  44.2,77.22 0 bottom
U$264  [QWIIC_5.5MM]  65.15,77.6 0 top
U$265  [SCL]  76.45,70.99 90 bottom
U$266  [SDA]  78.99,70.99 90 bottom
U$267  [3.3V]  81.53,70.99 90 bottom
U$268  [GND]  84.07,70.99 90 bottom
U$269  [(ADR)]  95.12,85.85 0 bottom
U$270  [GND]  84.07,70.99 90 top
U$271  [3.3V]  81.53,70.99 90 top
U$272  [I_SUPER2_C-()-03]  83.69,78.87 0 bottom
U$273  [INT#-[<-04]  86.61,70.74 90 top
U$274  [SDA]  78.99,70.99 90 top
U$275  [SCL]  76.45,70.99 90 top
U$276  [INT#-[<-04]  86.61,70.74 90 bottom
U$277  [GND]  89.15,70.99 90 top
U$278  [GND]  89.15,70.99 90 bottom
U$279  [SPARKX-MEDIUM]  92.71,77.85 0 bottom
U$280  [INT-()-04]  97.66,70.99 0 bottom
U$281  [LED2]  91.69,70.99 90 top
U$282  [LED2]  91.69,70.99 90 bottom
U$283  [STAT1]  69.22,78.23 0 top
U$284  [QWIIC0]  77.47,78.36 0 top
U$285  [BUTTON1]  81.53,78.36 0 top
U$286  [BUTTON1]  75.69,75.82 0 bottom
U$287  [QWIIC0]  75.18,77.22 0 bottom
U$288  [QWIIC_5.5MM]  96.14,77.6 0 top

## Library data of the parts
C1-C12 = SparkFun-Capacitors; PROD_ID: CAP-00810
D1-D12 = SparkFun-LED; PROD_ID: DIO-00819
E$1 E$2 LOGO1-LOGO12 U$24 U$48 U$72 U$96 U$120 U$144 U$168 U$192 U$216 U$240 U$264 U$288 = SparkFun-Aesthetics
E$3 = SparkFun-Retired
INT INT1-INT11 JP1 JP3 JP11 JP12 JP17 JP18 JP23 JP24 JP29 JP30 JP35 JP36 JP41 JP42 JP47 JP48 JP53 JP54 JP59 JP60 JP65 JP66 JP71 JP72 = SparkFun-Jumpers
J1 J9 J15 J21 J27 J33 J39 J45 J51 J57 J63 J69 = SparkFun-Connectors; PROD_ID: CONN-09696
J2 J3 J6 J8 J13 J14 J19 J20 J25 J26 J31 J32 J37 J38 J43 J44 J49 J50 J55 J56 J61 J62 J67 J68 = SparkFun-Connectors; PROD_ID: CONN-13694
J4 J5 J7 J10-J12 J16-J18 J22-J24 J28-J30 J34-J36 J40-J42 J46-J48 J52-J54 J58-J60 J64-J66 J70-J72 = SparkFun-Connectors
JP2 JP4-JP10 JP13-JP16 JP19-JP22 JP25-JP28 JP31-JP34 JP37-JP40 JP43-JP46 JP49-JP52 JP55-JP58 JP61-JP64 JP67-JP70 = SparkFun
R1 R2 R5 R6 R10 R12 R16 R17 R21 R22 R26 R27 R31 R32 R36 R37 R41 R42 R46 R47 R51 R52 R56 R57 = SparkFun-Resistors; PROD_ID: RES-08272
R3 R7 R9 R11 R13 R15 R18 R20 R23 R25 R28 R30 R33 R35 R38 R40 R43 R45 R48 R50 R53 R55 R58 R60 = SparkFun-Resistors; PROD_ID: RES-00824
R4 R8 R14 R19 R24 R29 R34 R39 R44 R49 R54 R59 = SparkFun-Resistors; PROD_ID: RES-07856
U1-U12 = SparkFun-IC-Microcontroller; PROD_ID: IC-14155
U$1 U$2 U$20 U$23 U$44-U$47 U$68-U$71 U$92-U$95 U$116-U$119 U$140-U$143 U$164-U$167 U$188-U$191 U$212-U$215 U$236-U$239 U$260-U$263 U$284-U$287 = buzzard_labels (4)
U$3 U$19 U$21 U$41-U$43 U$65-U$67 U$89-U$91 U$113-U$115 U$137-U$139 U$161-U$163 U$185-U$187 U$209-U$211 U$233-U$235 U$257-U$259 U$281-U$283 = buzzard_labels (3)
U$4 U$10 U$11 U$15 U$32 U$33 U$36 U$40 U$56 U$57 U$60 U$64 U$80 U$81 U$84 U$88 U$104 U$105 U$108 U$112 U$128 U$129 U$132 U$136 U$152 U$153 U$156 U$160 U$176 U$177 U$180 U$184 U$200 U$201 U$204 U$208 U$224 U$225 U$228 U$232 U$248 U$249 U$252 U$256 U$272 U$273 U$276 U$280 = Labels
U$5-U$9 U$12-U$14 U$16 U$17 U$22 U$25-U$31 U$34 U$35 U$37 U$38 U$49-U$55 U$58 U$59 U$61 U$62 U$73-U$79 U$82 U$83 U$85 U$86 U$97-U$103 U$106 U$107 U$109 U$110 U$121-U$127 U$130 U$131 U$133 U$134 U$145-U$151 U$154 U$155 U$157 U$158 U$169-U$175 U$178 U$179 U$181 U$182 U$193-U$199 U$202 U$203 U$205 U$206 U$217-U$223 U$226 U$227 U$229 U$230 U$241-U$247 U$250 U$251 U$253 U$254 U$265-U$271 U$274 U$275 U$277 U$278 = Labels-0_04
U$18 U$39 U$63 U$87 U$111 U$135 U$159 U$183 U$207 U$231 U$255 U$279 = SparkX

## Nets
3.3V: C2.1 INT.2 J1.3 J2.2 J3.2 J7.2 JP3.2 R3.2 U4.1
3.3V1: C1.1 INT1.2 J6.2 J8.2 J9.3 J10.2 JP12.2 R7.2 U1.1
3.3V2: C3.1 INT2.2 J13.2 J14.2 J15.3 J16.2 JP18.2 R13.2 U2.1
3.3V3: C4.1 INT3.2 J19.2 J20.2 J21.3 J22.2 JP24.2 R18.2 U3.1
3.3V4: C5.1 INT4.2 J25.2 J26.2 J27.3 J28.2 JP30.2 R23.2 U5.1
3.3V5: C6.1 INT5.2 J31.2 J32.2 J33.3 J34.2 JP36.2 R28.2 U6.1
3.3V6: C7.1 INT6.2 J37.2 J38.2 J39.3 J40.2 JP42.2 R33.2 U7.1
3.3V7: C8.1 INT7.2 J43.2 J44.2 J45.3 J46.2 JP48.2 R38.2 U8.1
3.3V8: C9.1 INT8.2 J49.2 J50.2 J51.3 J52.2 JP54.2 R43.2 U9.1
3.3V9: C10.1 INT9.2 J55.2 J56.2 J57.3 J58.2 JP60.2 R48.2 U10.1
3.3V10: C11.1 INT10.2 J61.2 J62.2 J63.3 J64.2 JP66.2 R53.2 U11.1
3.3V11: C12.1 INT11.2 J67.2 J68.2 J69.3 J70.2 JP72.2 R58.2 U12.1
!INT: J5.1 R11.1 U4.13
!INT1: J11.1 R9.1 U1.13
!INT2: J17.1 R15.1 U2.13
!INT3: J23.1 R20.1 U3.13
!INT4: J29.1 R25.1 U5.13
!INT5: J35.1 R30.1 U6.13
!INT6: J41.1 R35.1 U7.13
!INT7: J47.1 R40.1 U8.13
!INT8: J53.1 R45.1 U9.13
!INT9: J59.1 R50.1 U10.13
!INT10: J65.1 R55.1 U11.13
!INT11: J71.1 R60.1 U12.13
!RST: J7.5 R3.1 U4.4
!RST1: J10.5 R7.1 U1.4
!RST2: J16.5 R13.1 U2.4
!RST3: J22.5 R18.1 U3.4
!RST4: J28.5 R23.1 U5.4
!RST5: J34.5 R28.1 U6.4
!RST6: J40.5 R33.1 U7.4
!RST7: J46.5 R38.1 U8.4
!RST8: J52.5 R43.1 U9.4
!RST9: J58.5 R48.1 U10.4
!RST10: J64.5 R53.1 U11.4
!RST11: J70.5 R58.1 U12.4
ADR: JP1.2 U4.3
ADR1: JP11.2 U1.3
ADR2: JP17.2 U2.3
ADR3: JP23.2 U3.3
ADR4: JP29.2 U5.3
ADR5: JP35.2 U6.3
ADR6: JP41.2 U7.3
ADR7: JP47.2 U8.3
ADR8: JP53.2 U9.3
ADR9: JP59.2 U10.3
ADR10: JP65.2 U11.3
ADR11: JP71.2 U12.3
GND: C2.2 D1.C J1.4 J2.1 J3.1 J4.2 J7.6 JP1.1 U4.14
GND1: C1.2 D2.C J6.1 J8.1 J9.4 J10.6 J12.2 JP11.1 U1.14
GND2: C3.2 D3.C J13.1 J14.1 J15.4 J16.6 J18.2 JP17.1 U2.14
GND3: C4.2 D4.C J19.1 J20.1 J21.4 J22.6 J24.2 JP23.1 U3.14
GND4: C5.2 D5.C J25.1 J26.1 J27.4 J28.6 J30.2 JP29.1 U5.14
GND5: C6.2 D6.C J31.1 J32.1 J33.4 J34.6 J36.2 JP35.1 U6.14
GND6: C7.2 D7.C J37.1 J38.1 J39.4 J40.6 J42.2 JP41.1 U7.14
GND7: C8.2 D8.C J43.1 J44.1 J45.4 J46.6 J48.2 JP47.1 U8.14
GND8: C9.2 D9.C J49.1 J50.1 J51.4 J52.6 J54.2 JP53.1 U9.14
GND9: C10.2 D10.C J55.1 J56.1 J57.4 J58.6 J60.2 JP59.1 U10.14
GND10: C11.2 D11.C J61.1 J62.1 J63.4 J64.6 J66.2 JP65.1 U11.14
GND11: C12.2 D12.C J67.1 J68.1 J69.4 J70.6 J72.2 JP71.1 U12.14
INT_R: INT.1 R11.2
INT_R1: INT1.1 R9.2
INT_R2: INT2.1 R15.2
INT_R3: INT3.1 R20.2
INT_R4: INT4.1 R25.2
INT_R5: INT5.1 R30.2
INT_R6: INT6.1 R35.2
INT_R7: INT7.1 R40.2
INT_R8: INT8.1 R45.2
INT_R9: INT9.1 R50.2
INT_R10: INT10.1 R55.2
INT_R11: INT11.1 R60.2
LED: J4.1 U4.6
LED1: J12.1 U1.6
LED2: J18.1 U2.6
LED3: J24.1 U3.6
LED4: J30.1 U5.6
LED5: J36.1 U6.6
LED6: J42.1 U7.6
LED7: J48.1 U8.6
LED8: J54.1 U9.6
LED9: J60.1 U10.6
LED10: J66.1 U11.6
LED11: J72.1 U12.6
MISO: J7.1 U4.8
MISO1: J10.1 U1.8
MISO2: J16.1 U2.8
MISO3: J22.1 U3.8
MISO4: J28.1 U5.8
MISO5: J34.1 U6.8
MISO6: J40.1 U7.8
MISO7: J46.1 U8.8
MISO8: J52.1 U9.8
MISO9: J58.1 U10.8
MISO10: J64.1 U11.8
MISO11: J70.1 U12.8
N$2: D2.A R8.1
N$3: D1.A R4.1
N$7: D3.A R14.1
N$10: D4.A R19.1
N$13: D5.A R24.1
N$16: D6.A R29.1
N$19: D7.A R34.1
N$22: D8.A R39.1
N$25: D9.A R44.1
N$28: D10.A R49.1
N$31: D11.A R54.1
N$34: D12.A R59.1
SCL: J1.1 J2.4 J3.4 J7.3 R2.1 U4.9
SCL1: J6.4 J8.4 J9.1 J10.3 R5.1 U1.9
SCL2: J13.4 J14.4 J15.1 J16.3 R10.1 U2.9
SCL3: J19.4 J20.4 J21.1 J22.3 R16.1 U3.9
SCL4: J25.4 J26.4 J27.1 J28.3 R21.1 U5.9
SCL5: J31.4 J32.4 J33.1 J34.3 R26.1 U6.9
SCL6: J37.4 J38.4 J39.1 J40.3 R31.1 U7.9
SCL7: J43.4 J44.4 J45.1 J46.3 R36.1 U8.9
SCL8: J49.4 J50.4 J51.1 J52.3 R41.1 U9.9
SCL9: J55.4 J56.4 J57.1 J58.3 R46.1 U10.9
SCL10: J61.4 J62.4 J63.1 J64.3 R51.1 U11.9
SCL11: J67.4 J68.4 J69.1 J70.3 R56.1 U12.9
SCL_PU1: JP3.1 R2.2
SCL_PU2: JP12.1 R5.2
SCL_PU3: JP18.1 R10.2
SCL_PU4: JP24.1 R16.2
SCL_PU5: JP30.1 R21.2
SCL_PU6: JP36.1 R26.2
SCL_PU7: JP42.1 R31.2
SCL_PU8: JP48.1 R36.2
SCL_PU9: JP54.1 R41.2
SCL_PU10: JP60.1 R46.2
SCL_PU11: JP66.1 R51.2
SCL_PU12: JP72.1 R56.2
SDA: J1.2 J2.3 J3.3 J7.4 R1.1 U4.7
SDA1: J6.3 J8.3 J9.2 J10.4 R6.1 U1.7
SDA2: J13.3 J14.3 J15.2 J16.4 R12.1 U2.7
SDA3: J19.3 J20.3 J21.2 J22.4 R17.1 U3.7
SDA4: J25.3 J26.3 J27.2 J28.4 R22.1 U5.7
SDA5: J31.3 J32.3 J33.2 J34.4 R27.1 U6.7
SDA6: J37.3 J38.3 J39.2 J40.4 R32.1 U7.7
SDA7: J43.3 J44.3 J45.2 J46.4 R37.1 U8.7
SDA8: J49.3 J50.3 J51.2 J52.4 R42.1 U9.7
SDA9: J55.3 J56.3 J57.2 J58.4 R47.1 U10.7
SDA10: J61.3 J62.3 J63.2 J64.4 R52.1 U11.7
SDA11: J67.3 J68.3 J69.2 J70.4 R57.1 U12.7
SDA_PU1: JP3.3 R1.2
SDA_PU2: JP12.3 R6.2
SDA_PU3: JP18.3 R12.2
SDA_PU4: JP24.3 R17.2
SDA_PU5: JP30.3 R22.2
SDA_PU6: JP36.3 R27.2
SDA_PU7: JP42.3 R32.2
SDA_PU8: JP48.3 R37.2
SDA_PU9: JP54.3 R42.2
SDA_PU10: JP60.3 R47.2
SDA_PU11: JP66.3 R52.2
SDA_PU12: JP72.3 R57.2
STAT: R4.2 U4.10
STAT1: R8.2 U1.10
STAT2: R14.2 U2.10
STAT3: R19.2 U3.10
STAT4: R24.2 U5.10
STAT5: R29.2 U6.10
STAT6: R34.2 U7.10
STAT7: R39.2 U8.10
STAT8: R44.2 U9.10
STAT9: R49.2 U10.10
STAT10: R54.2 U11.10
STAT11: R59.2 U12.10
SWITCH_NO: U4.5
SWITCH_NO1: U1.5
SWITCH_NO2: U2.5
SWITCH_NO3: U3.5
SWITCH_NO4: U5.5
SWITCH_NO5: U6.5
SWITCH_NO6: U7.5
SWITCH_NO7: U8.5
SWITCH_NO8: U9.5
SWITCH_NO9: U10.5
SWITCH_NO10: U11.5
SWITCH_NO11: U12.5